# Altium PCB MotorDriverV3.PcbDoc
Units mil, origin at the board's own origin, x right, y up, seen from the top; angles counter-clockwise.
Board outline 6273.62 x 3988.19 mil, 4 copper layers (Top Layer, Mid-Layer 1, Mid-Layer 2, Bottom Layer); 219 components, 144 nets, 741 pads, 162 vias.
Unrouted connection lines stored in the file: 551.
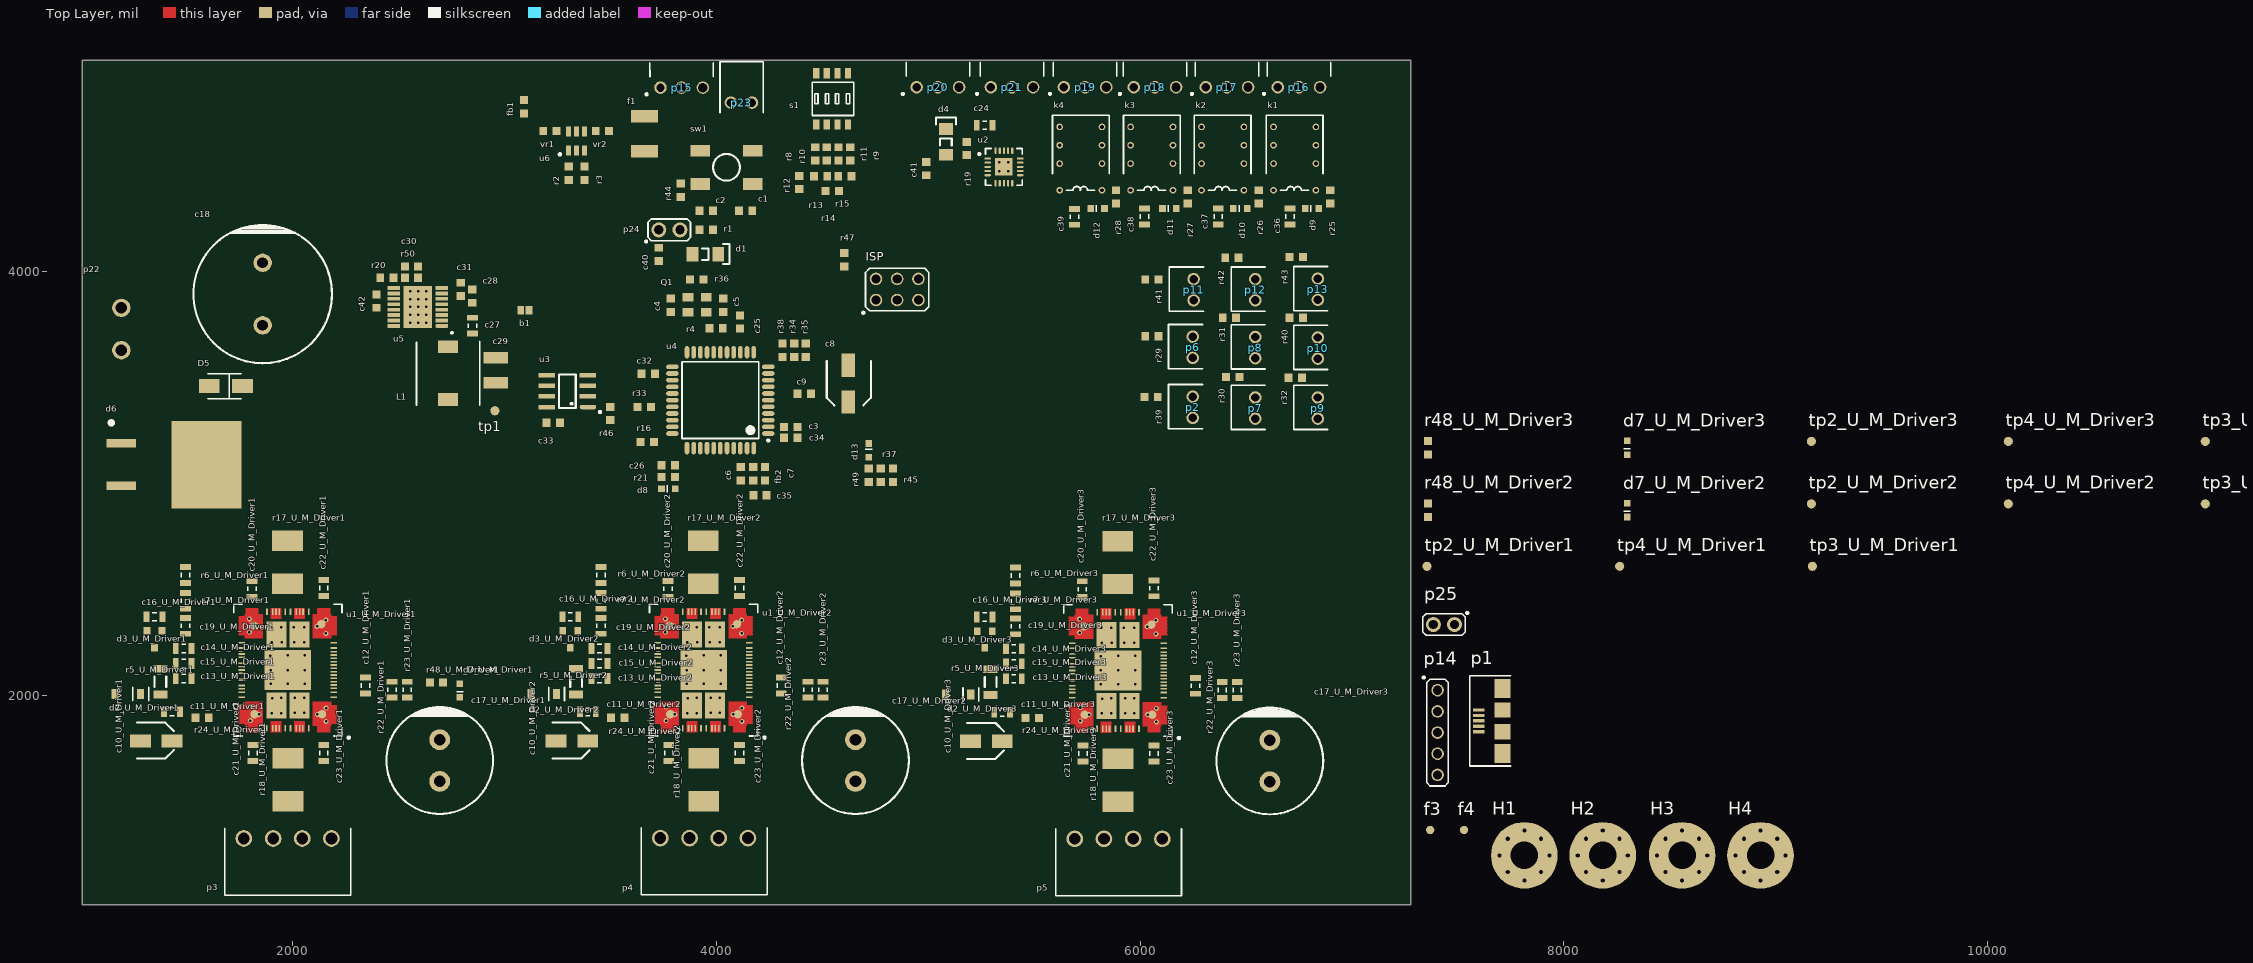
[diagram p0: Top Layer view]
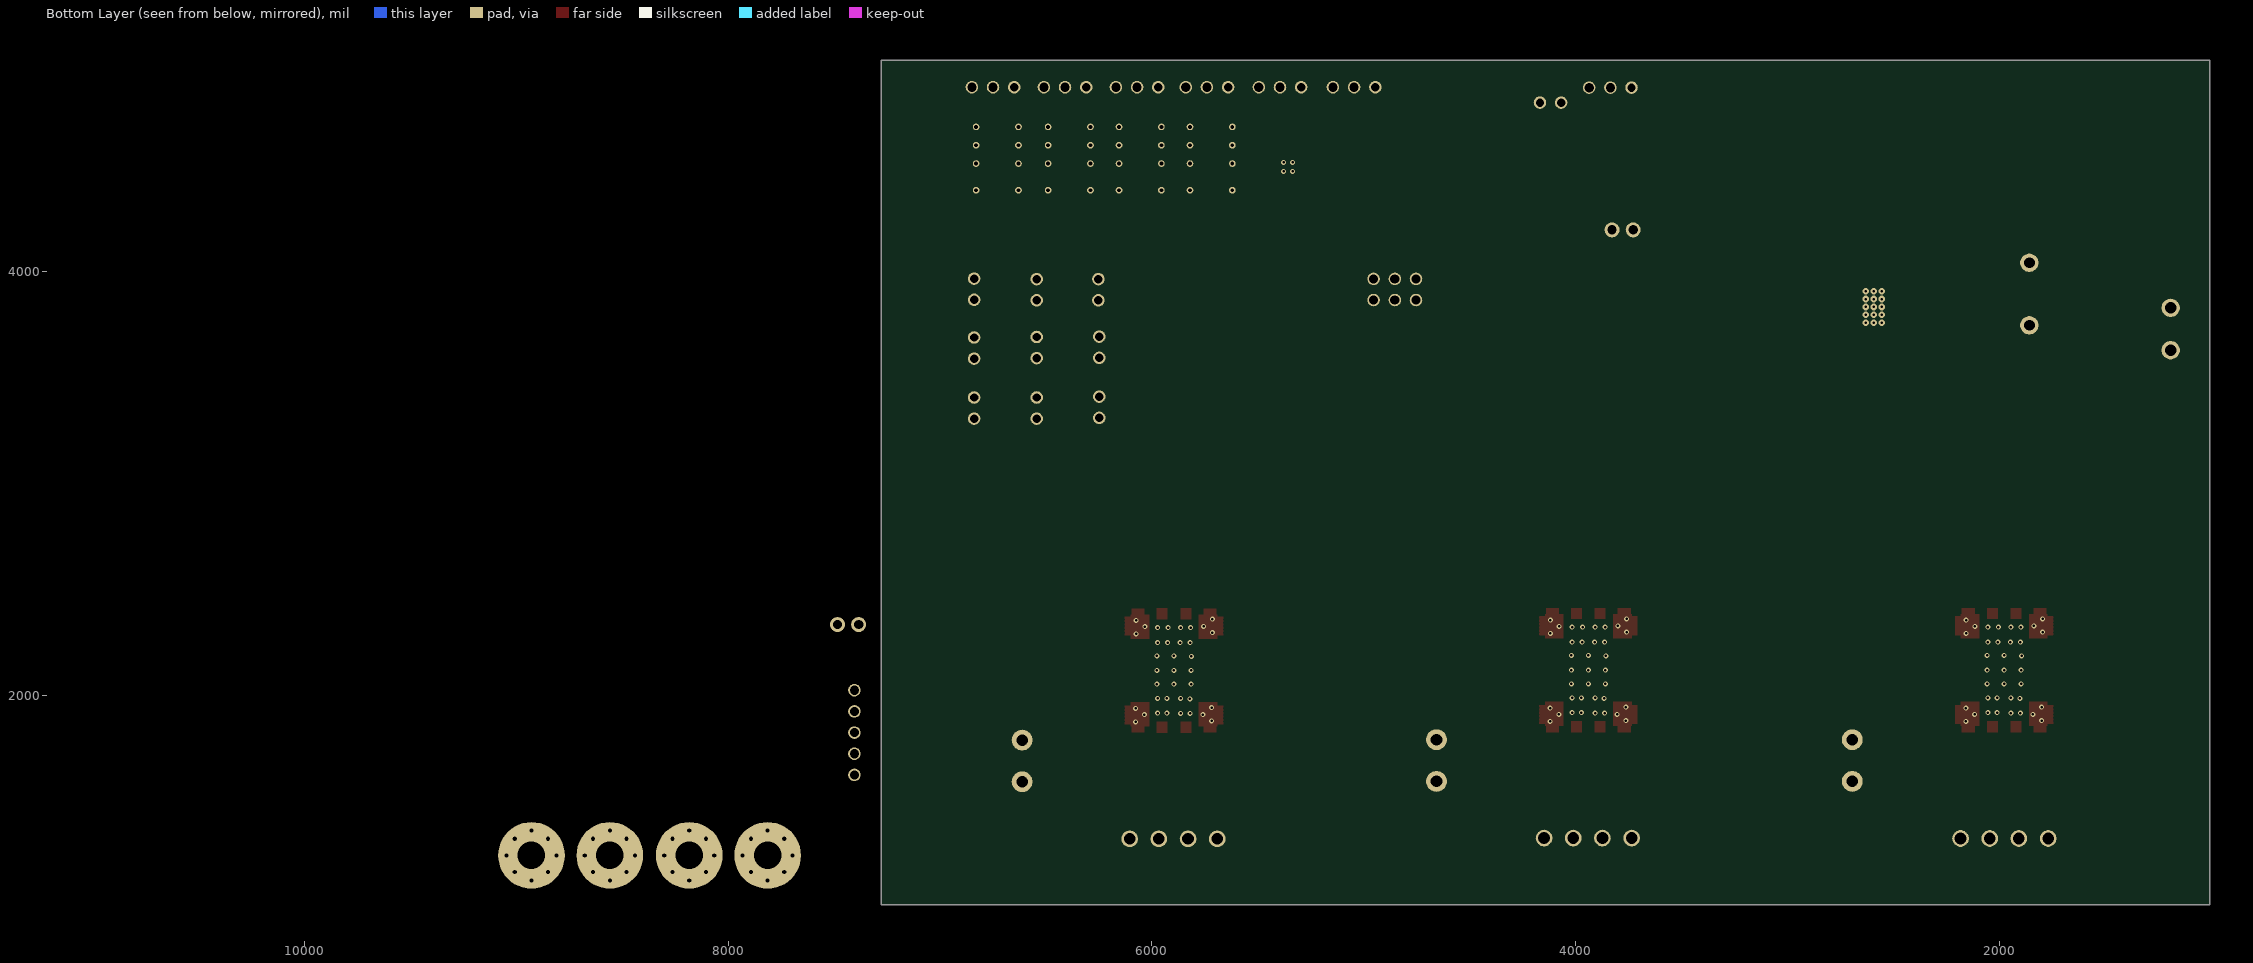
[diagram p1: Bottom Layer view, seen from below]

## Layer stack, top to bottom
Top Solder: solder mask 0.4, Solder Resist, Dk 3.5
Top Layer: signal copper 1.4
Dielectric 1: dielectric 12.6, FR-4, Dk 4.8
Mid-Layer 1: signal copper 1.4
Dielectric3: dielectric 12.6, FR-4, Dk 4.8
Mid-Layer 2: signal copper 1.4
Dielectric2: dielectric 12.6, FR-4, Dk 4.8
Bottom Layer: signal copper 1.4
Bottom Solder: solder mask 0.4, Solder Resist, Dk 3.5

## Board outline
1005,1011.81 7278.62,1011.81 7278.62,5000 1005,5000

## Design rules (kind name [scope] priority, off if disabled: settings)
Clearance [All] p1: gap=10 ignorepadtopadclearanceinfootprint=FALSE except(0: Arc-Hole Track-Hole SMDPad-Hole THPad-Hole Via-Hole Fill-Hole Poly-Hole Region-Hole Text-Hole)
DiffPairsRouting [All] p1: maxlimit=10 minlimit=10 mostfreqgap=10 toplayer_minwidth=15 toplayer_maxwidth=15 toplayer_prefwidth=15 midlayer1_minwidth=15 midlayer1_maxwidth=15 midlayer1_prefwidth=15 midlayer2_minwidth=15 midlayer2_maxwidth=15 midlayer2_prefwidth=15 bottomlayer_minwidth=15 bottomlayer_maxwidth=15 bottomlayer_prefwidth=15 maxuncoupledlength=500
PolygonConnect [All] p1: connectstyle=Relief reliefconductorwidth=10 reliefentries=4 polygonreliefangle="90 Angle" airgapwidth=10
RoomDefinition U_M_Driver3 [InComponentClass('U_M_Driver3')] p1: confinementstyle=ConfineIn formatcopy=TRUE lockcomponents=FALSE outline 7325,3100 11895,3100 11895,3350 7325,3350
RoomDefinition U_M_Driver2 [InComponentClass('U_M_Driver2')] p2: confinementstyle=ConfineIn formatcopy=TRUE lockcomponents=FALSE outline 7325,2805 11895,2805 11895,3055 7325,3055
RoomDefinition U_M_Driver1 [InComponentClass('U_M_Driver1')] p3: confinementstyle=ConfineIn formatcopy=TRUE lockcomponents=FALSE outline 7325,2580 10020,2580 10020,2760 7325,2760
RoutingVias [All] p1: holewidth=28 width=50 viastyle="Through Hole" minholewidth=28 minwidth=50 maxholewidth=28 maxwidth=50
SolderMaskExpansion [All] p1: expansion=4
Width [All] p1: maxlimit=10 minlimit=10 preferedwidth=10
29 further rules are at their usual default settings.

## Classes and differential pairs
channel class M_Driver: U_M_Driver1 U_M_Driver2 U_M_Driver3
net class SDO[1..3]: SDO1 SDO2 SDO3
net class Relay_OUT[1..4]: Relay_OUT1 Relay_OUT2 Relay_OUT3 Relay_OUT4 Relay_OUT5 Relay_OUT6 Relay_OUT7 Relay_OUT8
net class OUTB2_[1..3]: OUTB2_1 OUTB2_2 OUTB2_3
net class OUTB1_[1..3]: OUTB1_1 OUTB1_2 OUTB1_3
net class OUTA2_[1..3]: OUTA2_1 OUTA2_2 OUTA2_3
net class OUTA1_[1..3]: OUTA1_1 OUTA1_2 OUTA1_3
component class "U_Relais sheet": c24 c41 d4 d9 d10 d11 d12 p20 p21 r19 r25 r26 r27 r28 u2
component class "U_Power Supply": b1 c18 c27 c28 c29 c30 c31 c42 D5 d6 L1 p22 p25 r20 r50 tp1 u5
component class U_M_Driver3: c10_U_M_Driver3 c11_U_M_Driver3 c12_U_M_Driver3 c13_U_M_Driver3 c14_U_M_Driver3 c15_U_M_Driver3 c16_U_M_Driver3 c17_U_M_Driver3 c19_U_M_Driver3 c20_U_M_Driver3 c21_U_M_Driver3 c22_U_M_Driver3 c23_U_M_Driver3 d2_U_M_Driver3 d3_U_M_Driver3 d7_U_M_Driver3 r5_U_M_Driver3 r6_U_M_Driver3 r7_U_M_Driver3 r17_U_M_Driver3 r18_U_M_Driver3 r22_U_M_Driver3 r23_U_M_Driver3 r24_U_M_Driver3 r48_U_M_Driver3 tp2_U_M_Driver3 tp3_U_M_Driver3 tp4_U_M_Driver3 u1_U_M_Driver3
component class U_M_Driver2: c10_U_M_Driver2 c11_U_M_Driver2 c12_U_M_Driver2 c13_U_M_Driver2 c14_U_M_Driver2 c15_U_M_Driver2 c16_U_M_Driver2 c17_U_M_Driver2 c19_U_M_Driver2 c20_U_M_Driver2 c21_U_M_Driver2 c22_U_M_Driver2 c23_U_M_Driver2 d2_U_M_Driver2 d3_U_M_Driver2 d7_U_M_Driver2 r5_U_M_Driver2 r6_U_M_Driver2 r7_U_M_Driver2 r17_U_M_Driver2 r18_U_M_Driver2 r22_U_M_Driver2 r23_U_M_Driver2 r24_U_M_Driver2 r48_U_M_Driver2 tp2_U_M_Driver2 tp3_U_M_Driver2 tp4_U_M_Driver2 u1_U_M_Driver2
component class U_M_Driver1: c10_U_M_Driver1 c11_U_M_Driver1 c12_U_M_Driver1 c13_U_M_Driver1 c14_U_M_Driver1 c15_U_M_Driver1 c16_U_M_Driver1 c17_U_M_Driver1 c19_U_M_Driver1 c20_U_M_Driver1 c21_U_M_Driver1 c22_U_M_Driver1 c23_U_M_Driver1 d2_U_M_Driver1 d3_U_M_Driver1 d7_U_M_Driver1 r5_U_M_Driver1 r6_U_M_Driver1 r7_U_M_Driver1 r17_U_M_Driver1 r18_U_M_Driver1 r22_U_M_Driver1 r23_U_M_Driver1 r24_U_M_Driver1 r48_U_M_Driver1 tp2_U_M_Driver1 tp3_U_M_Driver1 tp4_U_M_Driver1 u1_U_M_Driver1
component class U_Controller: c1 c2 c3 c4 c5 c6 c7 c8 c9 c25 c26 c32 c33 c34 c35 c40 d1 d8 f1 fb1 fb2 p1 p14 p23 p24 Q1 r1 r2 r3 r4 r8 r9 r10 r11 r12 r13 r14 r15 r16 r21 r33 r34 r35 r36 r37 r38 r44 r45 r46 r47 s1 sw1 u3 u4 u6 vr1 vr2
component class "TOP Sheet": c36 c37 c38 c39 d13 f3 f4 H1 H2 H3 H4 ISP k1 k2 k3 k4 p2 p3 p4 p5 p6 p7 p8 p9 p10 p11 p12 p13 p15 p16 p17 p18 p19 r29 r30 r31 r32 r39 r40 r41 r42 r43 r49
differential pair USB: +USB_P -USB_N

## Components (designator, comment, footprint, x,y, rotation, side; value= is the part's Value field where it differs from the comment)
b1 "Solder Bridge" "Solder Bridge" 3095.55,3818.9 r0 top locked
c1 "100nF" 0603 4137.44,4288.86 r0 top locked
c2 "100nF" 0603 3952.44,4288.86 r180 top locked
c3 "1µF" 0603 4351.46,3267.72 r0 top locked
c4 "22pF" 0603 3784.53,3842.52 r90 top locked
c5 "22pF" 0603 4032.56,3842.52 r90 top locked
c6 "100nF" 0603 4115.24,3047.24 r90 top locked
c7 "100nF" 0603 4229.41,3047.24 r270 top locked
c8 "10u" Elco-C 4623.11,3472.44 r270 top locked
c9 "100nF" 0603 4414.45,3425.2 r0 top locked
c10_U_M_Driver1 "22µ" Elco-B 1354.61,1785.43 r0 top locked (schematic designator c10)
c10_U_M_Driver2 "22µ" Elco-B 3317.83,1785.43 r0 top locked (schematic designator c10)
c10_U_M_Driver3 "22µ" Elco-B 5274.53,1783.46 r0 top locked (schematic designator c10)
c11_U_M_Driver1 "100nF" 0805 1429.41,1923.23 r0 top locked (schematic designator c11)
c11_U_M_Driver2 "100nF" 0805 3392.64,1923.23 r0 top locked (schematic designator c11)
c11_U_M_Driver3 "100nF" 0805 5349.33,1921.26 r0 top locked (schematic designator c11)
c12_U_M_Driver1 "100nF" 0805 2342.8,2047.24 r270 top locked (schematic designator c12)
c12_U_M_Driver2 "100nF" 0805 4306.02,2047.24 r270 top locked (schematic designator c12)
c12_U_M_Driver3 "100nF" 0805 6262.72,2045.28 r270 top locked (schematic designator c12)
c13_U_M_Driver1 "100nF" 0805 1484.53,2080.71 r0 top locked (schematic designator c13)
c13_U_M_Driver2 "100nF" 0805 3447.76,2080.71 r0 top locked (schematic designator c13)
c13_U_M_Driver3 "100nF" 0805 5404.45,2078.74 r0 top locked (schematic designator c13)
c14_U_M_Driver1 "47nF" 0805 1484.53,2222.44 r0 top locked (schematic designator c14)
c14_U_M_Driver2 "47nF" 0805 3447.76,2222.44 r0 top locked (schematic designator c14)
c14_U_M_Driver3 "47nF" 0805 5404.45,2220.47 r0 top locked (schematic designator c14)
c15_U_M_Driver1 "470nF" 0805 1484.53,2151.57 r0 top locked (schematic designator c15)
c15_U_M_Driver2 "470nF" 0805 3447.76,2151.57 r0 top locked (schematic designator c15)
c15_U_M_Driver3 "470nF" 0805 5404.45,2149.61 r0 top locked (schematic designator c15)
c16_U_M_Driver1 "470n" 0805 1346.73,2372.05 r0 top locked (schematic designator c16)
c16_U_M_Driver2 "470n" 0805 3309.96,2372.05 r0 top locked (schematic designator c16)
c16_U_M_Driver3 "470n" 0805 5266.65,2370.08 r0 top locked (schematic designator c16)
c17_U_M_Driver1 "220µF 100V" "TH ELCO 12.5" 2693.19,1692.91 r270 top locked (schematic designator c17)
c17_U_M_Driver2 "220µF 100V" "TH ELCO 12.5" 4656.42,1692.91 r270 top locked (schematic designator c17)
c17_U_M_Driver3 "220µF 100V" "TH ELCO 12.5" 6613.11,1690.94 r270 top locked (schematic designator c17)
c18 "1000µF" "TH Elco 16" 1857.36,3895.67 r270 top locked
c19_U_M_Driver1 "100nF" 0805 1492.4,2328.74 r270 top locked (schematic designator c19)
c19_U_M_Driver2 "100nF" 0805 3455.63,2328.74 r270 top locked (schematic designator c19)
c19_U_M_Driver3 "100nF" 0805 5412.32,2326.77 r270 top locked (schematic designator c19)
c20_U_M_Driver1 "220n" 0805 1807.36,2503.94 r90 top locked (schematic designator c20)
c20_U_M_Driver2 "220n" 0805 3770.59,2503.94 r90 top locked (schematic designator c20)
c20_U_M_Driver3 "220n" 0805 5727.28,2501.97 r90 top locked (schematic designator c20)
c21_U_M_Driver1 "220n" 0805 1811.3,1728.35 r270 top locked (schematic designator c21)
c21_U_M_Driver2 "220n" 0805 3774.53,1728.35 r270 top locked (schematic designator c21)
c21_U_M_Driver3 "220n" 0805 5731.22,1726.38 r270 top locked (schematic designator c21)
c22_U_M_Driver1 "220n" 0805 2145.94,2507.87 r90 top locked (schematic designator c22)
c22_U_M_Driver2 "220n" 0805 4109.17,2507.87 r90 top locked (schematic designator c22)
c22_U_M_Driver3 "220n" 0805 6065.87,2505.91 r90 top locked (schematic designator c22)
c23_U_M_Driver1 "220n" 0805 2145.94,1728.35 r270 top locked (schematic designator c23)
c23_U_M_Driver2 "220n" 0805 4109.17,1728.35 r270 top locked (schematic designator c23)
c23_U_M_Driver3 "220n" 0805 6065.87,1726.38 r270 top locked (schematic designator c23)
c24 "100nF" 0805 5266.81,4692.91 r180 top locked
c25 "100nF" 0603 4111.3,3763.78 r90 top locked
c26 "100nF" 0603 3772.72,3086.61 r180 top locked
c27 "0.47µF" 0805 2847.52,3746.06 r270 top locked
c28 "10µF" 0603 2847.52,3885.83 r270 top locked
c29 "100µF" 1210 2957.76,3535.43 r270 top locked
c30 "33pF" 0603 2560.12,4025.59 r0 top locked
c31 "10µF" 0603 2792.4,3917.32 r270 top locked
c32 "100nF" 0603 3678.23,3519.68 r180 top locked
c33 "100nF" 0603 3229.41,3287.4 r180 top locked
c34 "100nF" 0603 4351.46,3216.54 r0 top locked
c35 "100nF" 0603 4205.79,2944.88 r0 top locked
c36 "1µF" 0805 6707.76,4261.81 r90 top locked
c37 "1µF" 0805 6369.17,4261.81 r90 top locked
c38 "1µF" 0805 6020.75,4261.81 r90 top locked
c39 "1µF" 0805 5690.04,4259.84 r90 top locked
c40 "1µF" 0603 3727.44,4082.68 r90 top locked
c41 "100nF" 0603 4991.22,4488.19 r90 top locked
c42 "100n" 0603 2394.76,3862.2 r270 top locked
d1 "CD1206-S01575" "1206 - DIODE" 3947.44,4083.86 r180 top locked
d2_U_M_Driver1 "DZ2W22000L" Mini2-F3-B 1220.75,2005.91 r270 top locked (schematic designator d2)
d2_U_M_Driver2 "DZ2W22000L" Mini2-F3-B 3183.98,2005.91 r270 top locked (schematic designator d2)
d2_U_M_Driver3 "DZ2W22000L" Mini2-F3-B 5140.67,2003.94 r270 top locked (schematic designator d2)
d3_U_M_Driver1 "BAS40-04" SOT23 1346.73,2265.75 r180 top locked (schematic designator d3)
d3_U_M_Driver2 "BAS40-04" SOT23 3309.96,2265.75 r180 top locked (schematic designator d3)
d3_U_M_Driver3 "BAS40-04" SOT23 5266.65,2263.78 r180 top locked (schematic designator d3)
d4 "CD1206-S01575" "1206 - DIODE" 5083.74,4614.17 r270 top locked
D5 "B260A-13-F" "DO-214AB (SMA)" 1684.13,3460.63 r180 top locked
d6 "NRVBB1060" "D²PAK 3" 1390.57,3090.55 r270 top locked
d7_U_M_Driver1 "Yellow SMD LED" "0603 - LED" 2788.46,2023.62 r90 top locked (schematic designator d7)
d7_U_M_Driver2 "Yellow SMD LED" "0603 - LED" 8300,2875 r90 top (schematic designator d7)
d7_U_M_Driver3 "Yellow SMD LED" "0603 - LED" 8300,3170 r90 top (schematic designator d7)
d8 "Green SMD LED" "0603 - LED" 3772.72,2976.38 r0 top locked
d9 "Yellow SMD LED" "0603 - LED" 6812.09,4299.21 r0 top locked
d10 "Yellow SMD LED" "0603 - LED" 6473.5,4299.21 r0 top locked
d11 "Yellow SMD LED" "0603 - LED" 6138.86,4299.21 r0 top locked
d12 "Yellow SMD LED" "0603 - LED" 5800.28,4299.21 r0 top locked
d13 "Yellow SMD LED" "0603 - LED" 4719.57,3157.48 r270 top locked
f1 "Fuse 500mA" "PTC Fuses" 3660.51,4651.57 r270 top locked
f3 "Fiducial" Fiducial 7370,1365 r0 top
f4 "Fiducial" Fiducial 7530,1365 r0 top
fb1 "0603 Ferrite Bead" 0603 3091.61,4779.53 r90 top locked
fb2 "0603 Ferrite Bead" 0603 4174.29,3047.24 r90 top locked
H1 "Mounting Hole" "Mounting Hole" 7815,1245 r0 top
H2 "Mounting Hole" "Mounting Hole" 8185,1245 r0 top
H3 "Mounting Hole" "Mounting Hole" 8560,1245 r0 top
H4 "Mounting Hole" "Mounting Hole" 8930,1245 r0 top
ISP "TC2030-MCP-NL" 2x3-HeaderPin 4853.43,3917.32 r180 top locked
k1 "IMxxTS" THT-8 6730.59,4535.31 r90 top locked
k2 "IMxxTS" THT-8 6390.59,4535.31 r90 top locked
k3 "IMxxTS" THT-8 6055.59,4535.31 r90 top locked
k4 "IMxxTS" THT-8 5720.59,4535.31 r90 top locked
L1 "18µH" "SMD Inductor 7.4x7.4" 2733.35,3521.65 r270 top locked
p1 "Micro USB Type B" "Micro USB Type B" 7655,1880 r90 top
p2 "Wire-to-Board 2P" WtB-F-2p_V 6249.09,3311.02 r90 top locked
p3 "4 contact" WtB-F-4p 1975.47,1324.8 r180 top locked
p4 "4 contact" WtB-F-4p 3942.01,1326.77 r180 top locked
p5 "4 contact" WtB-F-4p 5898.7,1322.83 r180 top locked
p6 "Wire-to-Board 2P" WtB-F-2p_V 6249.09,3594.49 r90 top locked
p7 "Wire-to-Board 2P" WtB-F-2p_V 6544.37,3307.09 r90 top locked
p8 "Wire-to-Board 2P" WtB-F-2p_V 6544.37,3592.91 r90 top locked
p9 "Wire-to-Board 2P" WtB-F-2p_V 6839.65,3307.09 r90 top locked
p10 "Wire-to-Board 2P" WtB-F-2p_V 6839.65,3590.55 r90 top locked
p11 "Wire-to-Board 2P" WtB-F-2p_V 6253.03,3866.14 r90 top locked
p12 "Wire-to-Board 2P" WtB-F-2p_V 6544.37,3866.14 r90 top locked
p13 "Wire-to-Board 2P" WtB-F-2p_V 6839.65,3868.5 r90 top locked
p14 "SPI" 1x5-HeaderPin 7405,1825 r90 top
p15 "Servo Port" "1X3 Headerpin Angled" 3835.71,4870.08 r180 top locked
p16 "Wire-to-Board 3P" "1X3 Headerpin Angled" 6750.59,4872.24 r180 top locked
p17 "Wire-to-Board 3P" "1X3 Headerpin Angled" 6410.59,4872.24 r180 top locked
p18 "Wire-to-Board 3P" "1X3 Headerpin Angled" 6070.59,4872.24 r180 top locked
p19 "Wire-to-Board 3P" "1X3 Headerpin Angled" 5740.59,4872.24 r180 top locked
p20 "Wire-to-Board 3P" "1X3 Headerpin Angled" 5045.59,4872.24 r180 top locked
p21 "Wire-to-Board 3P" "1X3 Headerpin Angled" 5395.59,4872.24 r180 top locked
p22 "MKDSN 1.5" SCREWWTB-2 1190.04,3730.31 r90 top locked
p23 "Wire-to-Board 2P" WtB-F-2p 4067.99,4799.21 r0 top locked
p24 "2 Pin Header" 1x2-HeaderPin 3777.83,4198.82 r180 top locked
p25 "Current Measurement" 1x2-HeaderPin 7435,2335 r0 top
Q1 "Crystal 16MHz, 3.2x2.5mm" X32 3908.46,3844.41 r180 top locked
r1 "10k" 0603 3952.44,4198.86 r0 top locked
r2 "22R" 0603 3302.24,4466.54 r270 top locked
r3 "22R" 0603 3377.05,4466.54 r270 top locked
r4 "1M" 0603 3998.46,3734.41 r0 top locked
r5_U_M_Driver1 "3k9" 1206 1374.29,2064.96 r270 top locked (schematic designator r5)
r5_U_M_Driver2 "3k9" 1206 3337.52,2064.96 r270 top locked (schematic designator r5)
r5_U_M_Driver3 "3k9" 1206 5294.21,2062.99 r270 top locked (schematic designator r5)
r6_U_M_Driver1 "27k" 0805 1492.4,2568.9 r90 top locked (schematic designator r6)
r6_U_M_Driver2 "27k" 0805 3455.63,2568.9 r90 top locked (schematic designator r6)
r6_U_M_Driver3 "27k" 0805 5412.32,2566.93 r90 top locked (schematic designator r6)
r7_U_M_Driver1 "1k8" 0805 1492.4,2446.85 r90 top locked (schematic designator r7)
r7_U_M_Driver2 "1k8" 0805 3455.63,2446.85 r90 top locked (schematic designator r7)
r7_U_M_Driver3 "1k8" 0805 5412.32,2444.88 r90 top locked (schematic designator r7)
r8 "1k" 0603 4466.57,4557.13 r90 top locked
r9 "1k" 0603 4631.57,4557.13 r90 top locked
r10 "1k" 0603 4521.57,4557.13 r90 top locked
r11 "1k" 0603 4576.57,4557.13 r90 top locked
r12 "1k" 0603 4391.57,4422.13 r270 top locked
r13 "520R" 0603 4491.57,4452.13 r180 top locked
r14 "520R" 0603 4546.57,4382.13 r180 top locked
r15 "520R" 0603 4606.57,4452.13 r180 top locked
r16 "10k" 0603 3672.71,3196.85 r0 top locked
r17_U_M_Driver1 "0R1" 2512 1974.68,2629.92 r270 top locked (schematic designator r17)
r17_U_M_Driver2 "0R1" 2512 3937.91,2629.92 r270 top locked (schematic designator r17)
r17_U_M_Driver3 "0R1" 2512 5894.61,2627.95 r270 top locked (schematic designator r17)
r18_U_M_Driver1 "0R1" 2512 1976.65,1602.36 r90 top locked (schematic designator r18)
r18_U_M_Driver2 "0R1" 2512 3939.88,1602.36 r90 top locked (schematic designator r18)
r18_U_M_Driver3 "0R1" 2512 5896.57,1600.39 r90 top locked (schematic designator r18)
r19 "10k" 0603 5182.17,4582.68 r90 top locked
r20 "442k" 0603 2443.98,3972.44 r0 top locked
r21 "330R" 0603 3772.72,3031.5 r0 top locked
r22_U_M_Driver1 "39k" 0805 2468.78,2027.56 r90 top locked (schematic designator r22)
r22_U_M_Driver2 "39k" 0805 4432.01,2027.56 r90 top locked (schematic designator r22)
r22_U_M_Driver3 "39k" 0805 6388.7,2025.59 r90 top locked (schematic designator r22)
r23_U_M_Driver1 "39k" 0805 2540.43,2027.56 r90 top locked (schematic designator r23)
r23_U_M_Driver2 "39k" 0805 4502.87,2027.56 r90 top locked (schematic designator r23)
r23_U_M_Driver3 "39k" 0805 6459.57,2025.59 r90 top locked (schematic designator r23)
r24_U_M_Driver1 "NP" 0603 1571.14,1895.67 r180 top locked (schematic designator r24)
r24_U_M_Driver2 "NP" 0603 3534.37,1895.67 r180 top locked (schematic designator r24)
r24_U_M_Driver3 "NP" 0603 5491.06,1893.7 r180 top locked (schematic designator r24)
r25 "220R" 0603 6898.7,4354.33 r90 top locked
r26 "220R" 0603 6560.12,4354.33 r90 top locked
r27 "220R" 0603 6225.47,4354.33 r90 top locked
r28 "220R" 0603 5886.89,4354.33 r90 top locked
r29 "10k" 0603 6056.18,3696.85 r180 top locked
r30 "10k" 0603 6438.07,3503.94 r180 top locked
r31 "10k" 0603 6422.32,3783.46 r180 top locked
r32 "10k" 0603 6733.35,3500 r180 top locked
r33 "47R" 0603 3658.54,3362.2 r0 top locked
r34 "47R" 0603 4367.2,3629.92 r270 top locked
r35 "47R" 0603 4422.32,3629.92 r270 top locked
r36 "47R" 0603 3906.57,3964.57 r180 top locked
r37 "47R" 0603 4776.65,3039.37 r90 top locked
r38 "47R" 0603 4312.09,3629.92 r270 top locked
r39 "10k" 0603 6052.24,3409.45 r180 top locked
r40 "10k" 0603 6737.28,3783.46 r180 top locked
r41 "10k" 0603 6056.18,3964.57 r180 top locked
r42 "10k" 0603 6434.13,4066.93 r180 top locked
r43 "10k" 0603 6737.28,4070.87 r180 top locked
r44 "47R" 0603 3831.77,4385.83 r270 top locked
r45 "10k" 0603 4833.74,3039.37 r90 top locked
r46 "10k" 0603 3499.09,3331.42 r270 top locked
r47 "10k" 0603 4603.43,4057.09 r270 top locked
r48_U_M_Driver1 "330R" 0603 2678.23,2061.02 r0 top locked (schematic designator r48)
r48_U_M_Driver2 "330R" 0603 7360,2875 r90 top (schematic designator r48)
r48_U_M_Driver3 "330R" 0603 7360,3170 r90 top (schematic designator r48)
r49 "330R" 0603 4719.57,3039.37 r270 top locked
r50 "1M" 0603 2560.12,3972.44 r180 top locked
s1 "MCDHN-04F-T-V" Dipswitch-4 4546.57,4817.13 r0 top locked
sw1 "MCDTSJW-6" MCDTSJW6 4047.44,4493.86 r180 top locked
tp1 "Test Point" "Test Point" 2953.82,3344.49 r0 top locked
tp2_U_M_Driver1 "Test Point" "Test Point" 7355,2610 r90 top (schematic designator tp2)
tp2_U_M_Driver2 "Test Point" "Test Point" 9170,2905 r90 top (schematic designator tp2)
tp2_U_M_Driver3 "Test Point" "Test Point" 9170,3200 r90 top (schematic designator tp2)
tp3_U_M_Driver1 "Test Point" "Test Point" 9175,2610 r90 top (schematic designator tp3)
tp3_U_M_Driver2 "Test Point" "Test Point" 11030,2905 r90 top (schematic designator tp3)
tp3_U_M_Driver3 "Test Point" "Test Point" 11030,3200 r90 top (schematic designator tp3)
tp4_U_M_Driver1 "Test Point" "Test Point" 8265,2610 r90 top (schematic designator tp4)
tp4_U_M_Driver2 "Test Point" "Test Point" 10100,2905 r90 top (schematic designator tp4)
tp4_U_M_Driver3 "Test Point" "Test Point" 10100,3200 r90 top (schematic designator tp4)
u1_U_M_Driver1 "powerSTEP01" VFQFPN 1976.26,2120.08 r180 top locked (schematic designator u1)
u1_U_M_Driver2 "powerSTEP01" VFQFPN 3939.49,2120.08 r180 top locked (schematic designator u1)
u1_U_M_Driver3 "powerSTEP01" VFQFPN 5896.18,2118.11 r180 top locked (schematic designator u1)
u2 "MAX4820ETP" TQFN-20 5357.36,4496.06 r90 top locked
u3 "256-Kbit F-RAM" SOIC8N 3296.34,3437.01 r90 top locked
u4 "ATMega32U4" TQFP-44 4018.46,3394.41 r180 top locked
u5 "LM46001" PWP0016G 2589.65,3834.65 r180 top locked
u6 "USBLC6-2SC6" SOT23-6 3339.65,4618.11 r0 top locked
vr1 "CG0603MLC-05E" 0603 3213.66,4665.35 r0 top locked
vr2 "CG0603MLC-05E" 0603 3461.69,4665.35 r180 top locked

## Footprints (in the part's own frame and the unit in brackets; to place one, negate y for a bottom-side part, rotate by r counter-clockwise, add the part's x,y. Pads: shape width x height; smd on the part's side, far side on the other; paste and mask are expansions set on the pad)
1x2-HeaderPin [mm] "1x2 Header Pin"
  round 1.8 hole 1.1: 1(1.27,0) 2(-1.27,0)
  silkscreen extent -2.53,-1.3 2.92,1.52, body extent -2.57,-1.3 2.51,1.24, height 5.94
"1X3 Headerpin Angled" [mm]
  round 1.5 hole 1: 1(2.54,0)
  round 1.5 hole 1.1: 2(0,0) 3(-2.54,0)
  silkscreen extent -3.81,-3 4.33,0.93, body extent -3.81,-10.69 3.81,0.36, height 5.97
1x5-HeaderPin [mm] "1x5 Header Pin"
  round 1.5 hole 1.1: 1(5.08,0) 2(2.54,0) 3(0,0) 4(-2.54,0) 5(-5.08,0)
  silkscreen extent -6.4,-1.3 6.73,1.78, body extent -6.35,-1.24 6.35,1.3, height 5.94
2x3-HeaderPin [mm] "2x3 Header Pin"
  round 1.5 hole 1.1: 1(2.54,1.27) 2(2.54,-1.27) 3(0,1.27) 4(0,-1.27) 5(-2.54,1.27) 6(-2.54,-1.27)
  silkscreen extent -3.8,-2.54 4.19,2.92, body extent -3.74,-2.5 3.88,2.58, height 5.94
0603 [mm] "Generic package"
  rect 0.95x1 smd: 1(-0.8,0) 2(0.8,0)
  body extent -0.8,-0.43 0.8,0.43, height 0.83
"0603 - LED" [mm] "Generic Package with marking"
  rect 0.8x0.8 smd: 1(-0.825,0) 2(0.825,0)
  silkscreen extent -0.15,-0.4 -0.15,0.4, body extent -0.82,-0.4 0.78,0.4, height 0.6
0805 [mm] "Generic Package"
  rect 0.7x1.3 smd: 1(-0.95,0) 2(0.95,0)
  silkscreen extent -0.25,-0.5 0.25,0.5, body extent -1,-0.63 1,0.63, height 0.43
1206 [mil] "Generic Package"
  rect 35.98x67.01 smd: 1(-60.51,0) 2(60.51,0)
  silkscreen extent -24,-28 24,28, body extent -63,-33 63,33, height 21
"1206 - DIODE" [mm] "Generic Package"
  rect 1.4x1.7 smd: 1(-1.537,0) 2(1.537,0)
  silkscreen extent -2.9,-1.2 0.4,1.2, body extent -1.6,-0.83 1.6,0.83, height 0.53
1210 [mm]
  rect 1.4x2.95 smd: 1(-1.5,0) 2(1.5,0)
  body extent -1.6,-1.25 1.6,1.25, height 1
2512 [mm]
  rect 2.45x3.7 smd: 1(-2.575,0) 2(2.575,0)
  body extent -3.17,-1.63 3.18,1.63, height 0.58
Dipswitch-4 [mm] "pitch 1.27x6.15"
  rect 0.76x1.25 smd: 1(-1.905,-3.075) 2(-0.635,-3.075) 3(0.635,-3.075) 4(1.905,-3.075) 5(1.905,3.075) 6(0.635,3.075) 7(-0.635,3.075) 8(-1.905,3.075)
  silkscreen extent -2.4,-2 2.6,2, body extent -3.11,-3.49 3.2,3.49, height 1.5
"DO-214AB (SMA)" [mm]
  rect 2.5x1.7 smd: 1(-2,0) 2(2,0)
  silkscreen extent -1.8,-1.5 2.2,1.53, body extent -2.5,-1.35 2.5,1.35, height 2.28
"D²PAK 3" [mil]
  rect 40x137.95 smd: 1(-100,-201.04) 3(100,-201.04)
  rect 412.99x329.92 smd: 4(0,201.04)
  silkscreen extent -209,-260 -184,-236, body extent -200,-249 200,352, height 192
Elco-B [mm] "SMD Electrolytic Capacitor-Size B-Pitch 1mm-4.3mm x 5.4mm"
  rect 2.5x1.6 smd: 1(-1.9,0) 2(1.9,0)
  silkscreen extent -2.3,-2.1 2.1,2.2, body extent -2.55,-2.1 2.45,2.2, height 6.42
Elco-C [mm] "SMD Electrolytic Capacitor-Size B-Pitch 1mm-5.3mm x 5.4mm"
  rect 2.8x1.6 smd: 1(-2.2,0) 2(2.2,0)
  silkscreen extent -2.7,-2.6 2.6,2.7, body extent -2.95,-2.65 2.95,2.65, height 5.41
Fiducial [mm]
  round 1 smd paste+0 mask+0.5: 0(0,0)
MCDTSJW6 [mm] "SMD Push Switch"
  rect 2.3x1.4 smd: 1(-3.15,2) 2(3.15,2) 3(-3.15,-2) 4(3.15,-2)
  silkscreen extent -1.6,-1.6 1.6,1.6, body extent -4,-3.25 4,3.25, height 4.3
"Micro USB Type B" [mm]
  rect 0.4x1.4 smd: 1(-1.3,1.425) 2(-0.65,1.425) 3(0,1.425) 4(0.65,1.425) 5(1.3,1.425)
  rect 2.3x1.9 smd: 6(-3.9,-1.425) 6(3.9,-1.425)
  rect 1.8x1.9 smd: 6(-1.3,-1.425) 6(1.3,-1.425)
  silkscreen extent -5.4,-2.4 5.4,2.5, body extent -3.99,-3.88 3.99,1.55, height 2.72
Mini2-F3-B [mm]
  rect 1.2x0.85 smd: 1(0,1.525) 2(0,-1.525)
  silkscreen extent -0.8,0.6 0.8,2.5, body extent -0.8,-1.3 0.8,1.3, height 0.8
"Mounting Hole" [mm]
  round 8 hole 3.3: 0(0,0)
"PTC Fuses" [mm]
  rect 1.5x3.2 smd: 1(-2.1,0) 2(2.1,0)
  body extent -2.2,-1.5 2.2,1.5, height 0.85
PWP0016G [mm] "PowerPAD TSSOP 16"
  rrect50% 1.5x0.45 smd: 1(-2.9,2.275)
  rect 1.5x0.45 smd: 2(-2.9,1.625) 3(-2.9,0.975) 4(-2.9,0.325) 5(-2.9,-0.325) 6(-2.9,-0.975) 7(-2.9,-1.625) 8(-2.9,-2.275) 9(2.9,-2.275) 10(2.9,-1.625) 11(2.9,-0.975) 12(2.9,-0.325) 13(2.9,0.325) 14(2.9,0.975) 15(2.9,1.625) 16(2.9,2.275)
  rect 3.4x5 smd mask-0.65: 17(0,0)
  silkscreen extent -4.2,3 -4,3.2, body extent -3.25,-2.55 3.25,2.55, height 1.06
SCREWWTB-2 [mm]
  round 2.2 hole 1.4: 1(-2.54,0) 2(2.54,0)
  body extent -5.07,-4.8 5.67,4.7, height 15
"SMD Inductor 7.4x7.4" [mm]
  rect 1.5x2.4 smd: 1(-3.15,0) 2(3.15,0)
  silkscreen extent -3.8,-3.8 3.8,3.8, body extent -3.65,-3.65 3.65,3.65, height 3.5
SOIC8N [mm] "SOIC8 Package, 127 Pitch, 390x490 Dimensions"
  oval 0.53x1.98 smd: 1(-1.905,-2.465)
  rect 0.53x1.98 smd: 2(-0.635,-2.465) 3(0.635,-2.465) 4(1.905,-2.465) 5(1.905,2.465) 6(0.635,2.465) 7(-0.635,2.465) 8(-1.905,2.465)
  silkscreen extent -2.6,-4 2,1, body extent -2.4,-3 2.5,3, height 1.7
"Solder Bridge" [mm]
  rect 0.8x1 smd: 1(-0.5,0) 2(0.5,0)
SOT23 [mm]
  rect 0.8x0.9 smd: 1(-0.9,-1) 2(0,1) 3(0.9,-1)
  body extent -1.5,-1.25 1.5,1.25, height 1.07
SOT23-6 [mm]
  rect 0.6x1.2 smd: 1(-0.95,-1.15) 2(0,-1.15) 3(0.95,-1.15) 4(0.95,1.15) 5(0,1.15) 6(-0.95,1.15)
  silkscreen extent -2.14,-1.74 -1.86,-1.46, body extent -1.47,-1.08 1.43,1.32, height 1
"Test Point" [mm]
  round 1.1 smd paste+0 mask+0: 1(0,0)
"TH ELCO 12.5" [mm] "D=12.5mm"
  round 2.5 hole 1.4: 1(-2.5,0) 2(2.5,0)
  silkscreen extent -6.4,-6.4 6.4,6.4, body extent -6.25,-6.25 6.25,6.25, height 25
"TH Elco 16" [mm] "D=16mm"
  round 2.2 hole 1.3: 1(-3.75,0) 2(3.75,0)
  silkscreen extent -8.3,-8.3 8.3,8.3, body extent -8,-8 8,8, height 35.5
THT-8 [mm]
  round 0.8 hole 0.45: 1(-3.8,-2.54) 2(-0.6,-2.54) 3(1.6,-2.54) 4(3.8,-2.54) 5(3.8,2.54) 6(1.6,2.54) 7(-0.6,2.54) 8(-3.8,2.54)
  silkscreen extent -3.8,-3.4 5.2,3.4, body extent -5,-3 5,3, height 5.8
TQFN-20 [mm] "QFN, 20-Leads, Body 4,00x4,00mm, Pitch 0,50mm, Thermal Pad 2,10x2,10mm, IPC Medium Density"
  oval 0.25x0.8 smd: 1(1,1.95) 2(0.5,1.95) 3(0,1.95) 4(-0.5,1.95) 5(-1,1.95) 11(-1,-1.95) 12(-0.5,-1.95) 13(0,-1.95) 14(0.5,-1.95) 15(1,-1.95)
  oval 0.8x0.25 smd: 6(-1.95,1) 7(-1.95,0.5) 8(-1.95,0) 9(-1.95,-0.5) 10(-1.95,-1) 16(1.95,-1) 17(1.95,-0.5) 18(1.95,0) 19(1.95,0.5) 20(1.95,1)
  rect 2.1x2.1 smd: 21(0,0)
  silkscreen extent -2.2,-2.2 2.2,3.07, body extent -2.05,-2.05 2.05,2.05, height 0.8
TQFP-44 [mm] "TQFP-44 pin, 127Pitch, 600-8N"
  oval 1.5x0.55 smd: 1(-5.75,4) 2(-5.75,3.2) 3(-5.75,2.4) 4(-5.75,1.6) 5(-5.75,0.8) 6(-5.75,0) 7(-5.75,-0.8) 8(-5.75,-1.6) 9(-5.75,-2.4) 10(-5.75,-3.2) 11(-5.75,-4) 23(5.75,-4) 24(5.75,-3.2) 25(5.75,-2.4) 26(5.75,-1.6) 27(5.75,-0.8) 28(5.75,0) 29(5.75,0.8) 30(5.75,1.6) 31(5.75,2.4) 32(5.75,3.2) 33(5.75,4)
  oval 0.55x1.5 smd: 12(-4,-5.75) 13(-3.2,-5.75) 14(-2.4,-5.75) 15(-1.6,-5.75) 16(-0.8,-5.75) 17(0,-5.75) 18(0.8,-5.75) 19(1.6,-5.75) 20(2.4,-5.75) 21(3.2,-5.75) 22(4,-5.75) 34(4,5.75) 35(3.2,5.75) 36(2.4,5.75) 37(1.6,5.75) 38(0.8,5.75) 39(0,5.75) 40(-0.8,5.75) 41(-1.6,5.75) 42(-2.4,5.75) 43(-3.2,5.75) 44(-4,5.75)
  silkscreen extent -5.88,-4.6 4.6,4.95, body extent -6,-6 6,6, height 1.2
VFQFPN [mm]
  rect 0.78x0.2 smd: 7(-5.5,3.27) 8(-5.5,2.65) 9(-5.5,2.2) 10(-5.5,1.8) 11(-5.5,1.4) 12(-5.5,1) 13(-5.5,0.6) 14(-5.5,0.2) 15(-5.5,-0.2) 16(-5.5,-0.6) 17(-5.5,-1) 18(-5.5,-1.4) 19(-5.5,-1.8) 20(-5.5,-2.2) 21(-5.5,-2.65) 22(-5.5,-3.27) 53(5.5,-3.27) 54(5.5,-2.65) 55(5.5,-1.93) 56(5.5,-1.54) 57(5.5,-0.8) 58(5.5,-0.4) 59(5.5,0) 60(5.5,0.4) 61(5.48,1.13) 62(5.5,1.85) 63(5.5,2.25) 64(5.5,2.65) 65(5.5,3.27)
  rect 0.2x0.78 smd: 33(-2.51,-7) 34(-1.82,-7) 35(-1.42,-7) 36(-1.01,-7) 37(-0.32,-7) 38(0.32,-7) 39(1.02,-7) 40(1.42,-7) 41(1.82,-7) 42(2.51,-7) 76(2.52,7) 77(1.82,7) 78(1.42,7) 79(1.02,7) 80(0.31,7) 81(-0.31,7) 82(-1.01,7) 83(-1.41,7) 84(-1.8,7) 85(-2.51,7)
  round 1 smd mask+0: 91(-4.1,5.3) 92(-4,-5.5) 95(4.1,-5.3) 96(4,5.3)
  rect 2.4x3.1 smd: 93(-1.38,-4.27) 94(1.38,-4.27) 97(1.38,4.27) 98(-1.38,4.27)
  rect 5.6x4.8 smd: 99(0,0)
  Top Layer region: 5.85,4.2 5.18,4.2 5.18,3.81 2.99,3.81 2.99,6.7 3.54,6.7 3.54,7.43 5.07,7.43 5.07,6.7 5.19,6.7 5.19,6.43 5.85,6.43
  Top Layer region: -5.85,4.2 -5.18,4.2 -5.18,3.81 -2.99,3.81 -2.99,6.7 -3.54,6.7 -3.54,7.43 -5.07,7.43 -5.07,6.7 -5.19,6.7 -5.19,6.43 -5.85,6.43
  Top Layer region: 5.85,-4.2 5.18,-4.2 5.18,-3.81 2.99,-3.81 2.99,-6.7 3.54,-6.7 3.54,-7.43 5.07,-7.43 5.07,-6.7 5.19,-6.7 5.19,-6.43 5.85,-6.43
  Top Layer region: -5.845,-6.42 -5.885,-6.42 -5.885,-6.22 -5.845,-6.22 -5.845,-6.02 -5.885,-6.02 -5.885,-5.82 -5.845,-5.82 -5.845,-5.62 -5.885,-5.62 -5.885,-5.42 -5.845,-5.42 -5.845,-5.22 -5.885,-5.22 -5.885,-5.02 -5.845,-5.02 -5.845,-4.82 -5.885,-4.82 -5.885,-4.62 -5.845,-4.62 -5.845,-4.42 -5.885,-4.42 -5.885,-4.22 -5.865,-4.22 -5.845,-4.2
  Top Layer region: 5.85,-4.22 5.89,-4.22 5.89,-4.42 5.85,-4.42 5.85,-4.62 5.89,-4.62 5.89,-4.82 5.85,-4.82 5.85,-5.02 5.89,-5.02 5.89,-5.23 5.85,-5.23 5.85,-5.42 5.89,-5.42 5.89,-5.62 5.85,-5.62 5.85,-5.82 5.89,-5.82 5.89,-6.02 5.85,-6.02 5.85,-6.22 5.89,-6.22 5.89,-6.42 5.87,-6.42 5.85,-6.43
  Top Layer region: -5.845,4.22 -5.885,4.22 -5.885,4.42 -5.845,4.42 -5.845,4.62 -5.885,4.62 -5.885,4.82 -5.845,4.82 -5.845,5.02 -5.885,5.02 -5.885,5.22 -5.845,5.22 -5.845,5.42 -5.885,5.42 -5.885,5.62 -5.845,5.62 -5.845,5.82 -5.885,5.82 -5.885,6.02 -5.845,6.02 -5.845,6.22 -5.885,6.22 -5.885,6.42 -5.865,6.42 -5.845,6.43
  Top Layer region: 5.85,6.42 5.89,6.42 5.89,6.22 5.85,6.22 5.85,6.02 5.89,6.02 5.89,5.82 5.85,5.82 5.85,5.62 5.89,5.62 5.89,5.42 5.85,5.42 5.85,5.22 5.89,5.22 5.89,5.02 5.85,5.02 5.85,4.82 5.89,4.82 5.89,4.62 5.85,4.62 5.85,4.42 5.89,4.42 5.89,4.22 5.87,4.22 5.85,4.2
  Top Layer region: -0.79,6.14 -2.05,6.14 -2.05,7.44 -0.79,7.44
  Top Layer region: 2.05,6.14 0.79,6.14 0.79,7.44 2.05,7.44
  Top Layer region: 2.05,-7.44 0.79,-7.44 0.79,-6.14 2.05,-6.14
  Top Layer region: -0.79,-7.44 -2.05,-7.44 -2.05,-6.14 -0.79,-6.14
  Top Layer region: -5.85,-4.2 -5.18,-4.2 -5.18,-3.81 -2.99,-3.81 -2.99,-6.7 -3.54,-6.7 -3.54,-7.43 -5.07,-7.43 -5.07,-6.7 -5.19,-6.7 -5.19,-6.43 -5.85,-6.43
  silkscreen extent -7.44,-7.9 6.5,8.24, body extent -5.5,-7 5.5,6.99, height 0.9
WtB-F-2p [mm]
  round 1.5 hole 1: 1(0,0) 2(2.54,0)
  silkscreen extent -1.3,-1.2 3.9,4.9, body extent -1.16,-1.38 3.92,13.05, height 6.02
WtB-F-2p_V [mm]
  round 1.5 hole 1: 1(0,0) 2(2.54,0)
  silkscreen extent -1.3,-1.2 4,2.9, body extent -1.18,-3.2 3.9,2.6, height 11.45
WtB-F-4p [mm]
  round 2 hole 1.4: 1(-5.25,0) 2(-1.75,0) 3(1.75,0) 4(5.25,0)
  silkscreen extent -7.55,-1.2 7.55,6.8
X32 [mm] "Crystal Oscillator X32 Package, 3.2x2.5"
  rect 1.3x1 smd: 1(-1.1,-0.9) 2(1.1,-0.9) 3(1.1,0.9) 4(-1.1,0.9)
  body extent -1.6,-1.25 1.6,1.25, height 0.91

## Part data
c1 c2 c3 c4 c5 c6 c7 c9 c25 c26 c28 c30 c31 c32 c33 c34 c35 c40 c41 c42: library part "0603 Capacitor", "...F"
c8: library part "Elco C"
c10_U_M_Driver1 c10_U_M_Driver2 c10_U_M_Driver3: library part "Elco B"
c11_U_M_Driver1 c11_U_M_Driver2 c11_U_M_Driver3 c12_U_M_Driver1 c12_U_M_Driver2 c12_U_M_Driver3 c13_U_M_Driver1 c13_U_M_Driver2 c13_U_M_Driver3 c14_U_M_Driver1 c14_U_M_Driver2 c14_U_M_Driver3 c15_U_M_Driver1 c15_U_M_Driver2 c15_U_M_Driver3 c16_U_M_Driver1 c16_U_M_Driver2 c16_U_M_Driver3 c19_U_M_Driver1 c19_U_M_Driver2 c19_U_M_Driver3 c20_U_M_Driver1 c20_U_M_Driver2 c20_U_M_Driver3 c21_U_M_Driver1 c21_U_M_Driver2 c21_U_M_Driver3 c22_U_M_Driver1 c22_U_M_Driver2 c22_U_M_Driver3 c23_U_M_Driver1 c23_U_M_Driver2 c23_U_M_Driver3 c24 c27 c36 c37 c38 c39: library part "0805 Capacitor", "...F"
c17_U_M_Driver1 c17_U_M_Driver2 c17_U_M_Driver3: library part "Elco TH d12.5", "d = 12.5mm"
c18: library part "Elco TH d16", "d = 16mm"
c29: library part "1210 Capacitor", "C1210C107M8PACTU"
d1 d4: "Switching Chip Diode"
d2_U_M_Driver1 d2_U_M_Driver2 d2_U_M_Driver3: "Zener diode"
D5: "Schottky Rectifier"
d6: "Schottky Diode 10A"
d7_U_M_Driver1 d7_U_M_Driver2 d7_U_M_Driver3 d8 d9 d10 d11 d12 d13: "0603 Package"
f1: library part "MF-MSMF Fuse", "Style 1"
ISP: library part "2x3 Header", "Header Pin"
k1 k2 k3 k4: "Standard THT Package"
L1: library part SRR0735A-180M, "Shielded Power Inducor"
p1: "SMD"
p3 p4 p5: library part "Wire-to-Board connector 4 contacts", "Wire-to-Board connector"
p14: library part "5 Pin Header"
p15: library part "Wire-to-Board 3 Pin"
p22: "Wire-to-board connection"
p25: library part "2 Pin Header", "2 Pin Header"
Q1: "X32"
r1 r2 r3 r4 r8 r9 r10 r11 r12 r13 r14 r15 r16 r19 r20 r21 r24_U_M_Driver1 r24_U_M_Driver2 r24_U_M_Driver3 r25 r26 r27 r28 r29 r30 r31 r32 r33 r34 r35 r36 r37 r38 r39 r40 r41 r42 r43 r44 r45 r46 r47 r48_U_M_Driver1 r48_U_M_Driver2 r48_U_M_Driver3 r49 r50: library part "0603 Resistor", "...R"
r5_U_M_Driver1 r5_U_M_Driver2 r5_U_M_Driver3: library part "1206 Resistor", "..R"
r6_U_M_Driver1 r6_U_M_Driver2 r6_U_M_Driver3 r7_U_M_Driver1 r7_U_M_Driver2 r7_U_M_Driver3 r22_U_M_Driver1 r22_U_M_Driver2 r22_U_M_Driver3 r23_U_M_Driver1 r23_U_M_Driver2 r23_U_M_Driver3: library part "0805 Resistor", "...R"
r17_U_M_Driver1 r17_U_M_Driver2 r17_U_M_Driver3 r18_U_M_Driver1 r18_U_M_Driver2 r18_U_M_Driver3: library part "2512 Resistor", "..R"
s1: "Dipswitch 4 way"
sw1: "Push button"
u1_U_M_Driver1 u1_U_M_Driver2 u1_U_M_Driver3: "VFQFPN"
u2: "20 TQFN-EP"
u3: library part FM25W256, "256-Kbit (32Kx8) Serial SPI F-RAM"
u6: "SOT23-6 ESD"
vr1 vr2: "5V, 8V Varistor - 0603"

## Via types
v1: diameter 23.62, hole 11.81, Top Layer to Bottom Layer, 115 vias
v2: diameter 31.5, hole 19.68, Top Layer to Bottom Layer, 32 vias
v3: diameter 31.5, hole 11.81, Top Layer to Bottom Layer, 15 vias

## Nets (pads, with @x,y where several pads share a name; then routed paths per layer and width w, separated by ;. In a path a pad name is that pad's centre, name@x,y a point inside that pad or via, vN(x,y) a via of type N, cw(c..) or ccw(c..) an arc to the next point about the centre after c; other vN are vias at no path point)
3v3: c1.1 c2.1 c3.1 c24.1 c25.1 c26.1 c33.2 c34.1 c35.1 c36.2 c37.2 c38.2 c39.2 d1.1 d4.1 d9.1 d10.1 d11.1 d12.1 d13.1 fb2.1 ISP.2 k1.8 k2.8 k3.8 k4.8 p15.3 p25.2 r1.2 r19.2 r21.2 r29.2 r30.2 r31.2 r32.2 r39.2 r40.2 r41.2 r42.2 r43.2 r45.2 r46.2 r47.2 s1.5 s1.6 s1.7 s1.8 u2.13 u2.19 u3.3 u3.8 u4.2 u4.14 u4.34
CS0: p14.1 r37.1 r45.1 u1_U_M_Driver1.10 u1_U_M_Driver2.10 u1_U_M_Driver3.10
CS1: r36.1 r47.1 u2.2
CS_FRAM: r33.1 r46.1 u3.1
ERC0: p2.2 r39.1 u4.18
ERC1: p6.2 r29.1 u4.19
ERC2: p7.2 r30.1 u4.25
ERC3: p8.2 r31.1 u4.22
ERC4: p9.2 r32.1 u4.26
ERC5: p10.2 r40.1 u4.27
F\L\A\G\: r23_U_M_Driver1.2 r23_U_M_Driver2.2 r23_U_M_Driver3.2 r49.2 u1_U_M_Driver1.16 u1_U_M_Driver2.16 u1_U_M_Driver3.16 u4.31
FRAM_H\O\L\D\: u3.7 u4.30
GND: c1.2 c2.2 c3.2 c4.2 c5.2 c6.1 c7.2 c8.1 c9.2 c10_U_M_Driver1.1 c10_U_M_Driver2.1 c10_U_M_Driver3.1 c11_U_M_Driver1.1 c11_U_M_Driver2.1 c11_U_M_Driver3.1 c12_U_M_Driver1.2 c12_U_M_Driver2.2 c12_U_M_Driver3.2 c13_U_M_Driver1.1 c13_U_M_Driver2.1 c13_U_M_Driver3.1 c15_U_M_Driver1.1 c15_U_M_Driver2.1 c15_U_M_Driver3.1 c17_U_M_Driver1.1 c17_U_M_Driver2.1 c17_U_M_Driver3.1 c18.1 c19_U_M_Driver1.1 c19_U_M_Driver2.1 c19_U_M_Driver3.1 c20_U_M_Driver1.2 c20_U_M_Driver2.2 c20_U_M_Driver3.2 c21_U_M_Driver1.2 c21_U_M_Driver2.2 c21_U_M_Driver3.2 c22_U_M_Driver1.2 c22_U_M_Driver2.2 c22_U_M_Driver3.2 c23_U_M_Driver1.2 c23_U_M_Driver2.2 c23_U_M_Driver3.2 c24.2 c25.2 c26.2 c28.1 c29.1 c31.1 c32.2 c33.1 c34.2 c35.2 c36.1 c37.1 c38.1 c39.1 c40.1 c41.1 c42.1 d2_U_M_Driver1.2 d2_U_M_Driver2.2 d2_U_M_Driver3.2 d8.2 fb1.1 fb1.2 ISP.6 p1.5 p1.6 p2.1 p6.1 p7.1 p8.1 p9.1 p10.1 p11.1 p12.1 p13.1 p14.5 p15.1 p22.2 Q1.2 Q1.4 r7_U_M_Driver1.1 r7_U_M_Driver2.1 r7_U_M_Driver3.1 r12.2 r16.1 r17_U_M_Driver1.1 r17_U_M_Driver2.1 r17_U_M_Driver3.1 r18_U_M_Driver1.1 r18_U_M_Driver2.1 r18_U_M_Driver3.1 r20.1 sw1.3 sw1.4 u1_U_M_Driver1.8 u1_U_M_Driver1.21 u1_U_M_Driver1.59 u1_U_M_Driver1.99 u1_U_M_Driver2.8 u1_U_M_Driver2.21 u1_U_M_Driver2.59 u1_U_M_Driver2.99 u1_U_M_Driver3.8 u1_U_M_Driver3.21 u1_U_M_Driver3.59 u1_U_M_Driver3.99 u2.7 u2.10 u2.16 u2.21 u3.4 u4.5 u4.15 u4.23 u4.35 u4.43 u5.6 u5.10 u5.15 u5.16 u5.17 u6.2 vr1.1 vr2.1
  other v1: 5815.47,2053.15 5896.18,2053.15 5976.89,2053.15 1895.55,2055.12 1976.26,2055.12 2056.97,2055.12 3858.78,2055.12 3939.49,2055.12 4020.2,2055.12 5815.47,2118.11 5896.18,2118.11 5976.89,2118.11 1895.55,2120.08 1976.26,2120.08 2056.97,2120.08 3858.78,2120.08 3939.49,2120.08 4020.2,2120.08 5813.5,2185.04 1893.58,2187.01 3856.81,2187.01 5896.18,2187.01 5976.89,2187.01 1976.26,2188.98 2056.97,2188.98 3939.49,2188.98 4020.2,2188.98 5335.71,4474.41 5379.02,4474.41 5335.71,4517.72 5379.02,4517.72
  other v3: 2554.21,3759.84 2591.61,3759.84 2629.02,3759.84 2554.21,3797.24 2591.61,3797.24 2629.02,3797.24 2554.21,3834.65 2591.61,3834.65 2629.02,3834.65 2554.21,3872.05 2591.61,3872.05 2629.02,3872.05 2554.21,3909.45 2591.61,3909.45 2629.02,3909.45
Home0: p11.2 r41.1 u4.38
Home1: p12.2 r42.1 u4.37
Home2: p13.2 r43.1 u4.36
M_Reset: u1_U_M_Driver1.19 u1_U_M_Driver2.19 u1_U_M_Driver3.19 u4.1
MOSI: ISP.1 p14.3 r34.1 u1_U_M_Driver1.12 u2.3 u3.5
Netb1_2: b1.2 p25.1
Netc4_1: c4.1 Q1.3 r4.1 u4.17
Netc5_1: c5.1 Q1.1 r4.2 u4.16
Netc6_2: c6.2 u4.42
Netc7_1: c7.1 c32.1 fb2.2 u4.24 u4.44
Netc13_U_M_Driver1_2: c13_U_M_Driver1.2 c15_U_M_Driver1.2 tp4_U_M_Driver1.1 u1_U_M_Driver1.58 u1_U_M_Driver1.60
Netc13_U_M_Driver2_2: c13_U_M_Driver2.2 c15_U_M_Driver2.2 tp4_U_M_Driver2.1 u1_U_M_Driver2.58 u1_U_M_Driver2.60
Netc13_U_M_Driver3_2: c13_U_M_Driver3.2 c15_U_M_Driver3.2 tp4_U_M_Driver3.1 u1_U_M_Driver3.58 u1_U_M_Driver3.60
Netc14_U_M_Driver1_1: c14_U_M_Driver1.1 d3_U_M_Driver1.2
Netc14_U_M_Driver1_2: c14_U_M_Driver1.2 u1_U_M_Driver1.57
Netc14_U_M_Driver2_1: c14_U_M_Driver2.1 d3_U_M_Driver2.2
Netc14_U_M_Driver2_2: c14_U_M_Driver2.2 u1_U_M_Driver2.57
Netc14_U_M_Driver3_1: c14_U_M_Driver3.1 d3_U_M_Driver3.2
Netc14_U_M_Driver3_2: c14_U_M_Driver3.2 u1_U_M_Driver3.57
Netc16_U_M_Driver1_1: c16_U_M_Driver1.1 d3_U_M_Driver1.3 tp2_U_M_Driver1.1 u1_U_M_Driver1.56
Netc16_U_M_Driver2_1: c16_U_M_Driver2.1 d3_U_M_Driver2.3 tp2_U_M_Driver2.1 u1_U_M_Driver2.56
Netc16_U_M_Driver3_1: c16_U_M_Driver3.1 d3_U_M_Driver3.3 tp2_U_M_Driver3.1 u1_U_M_Driver3.56
Netc27_1: c27.1 u5.3
Netc28_2: c28.2 u5.4
Netc30_1: c30.1 r20.2 r50.2 u5.9
Netc40_2: c40.2 p24.1
Netc41_2: c41.2 d4.2 r19.1 u2.1 u2.20
Netd2_U_M_Driver1_1: d2_U_M_Driver1.1 r5_U_M_Driver1.2 u1_U_M_Driver1.61
Netd2_U_M_Driver2_1: d2_U_M_Driver2.1 r5_U_M_Driver2.2 u1_U_M_Driver2.61
Netd2_U_M_Driver3_1: d2_U_M_Driver3.1 r5_U_M_Driver3.2 u1_U_M_Driver3.61
Netd7_U_M_Driver1_2: d7_U_M_Driver1.2 r48_U_M_Driver1.2
Netd7_U_M_Driver2_2: d7_U_M_Driver2.2 r48_U_M_Driver2.2
Netd7_U_M_Driver3_2: d7_U_M_Driver3.2 r48_U_M_Driver3.2
Netd8_1: d8.1 r21.1
Netd9_2: d9.2 r25.1
Netd10_2: d10.2 r26.1
Netd11_2: d11.2 r27.1
Netd12_2: d12.2 r28.1
Netd13_2: d13.2 r49.1
Netf1_1: f1.1 p1.1 u6.5
Netk1_2: k1.2 k1.7 p16.3
Netk1_3: k1.3 k1.6 p16.2
Netk1_4: k1.4 k1.5 p16.1
Netk2_2: k2.2 k2.7 p17.3
Netk2_3: k2.3 k2.6 p17.2
Netk2_4: k2.4 k2.5 p17.1
Netk3_2: k3.2 k3.7 p18.3
Netk3_3: k3.3 k3.6 p18.2
Netk3_4: k3.4 k3.5 p18.1
Netk4_2: k4.2 k4.7 p19.3
Netk4_3: k4.3 k4.6 p19.2
Netk4_4: k4.4 k4.5 p19.1
Netp1_2: p1.2 u6.4 vr2.2
Netp1_3: p1.3 u6.6 vr1.2
Netr2_1: r2.1 u6.1
Netr3_1: r3.1 u6.3
Netr6_U_M_Driver1_1: r6_U_M_Driver1.1 r7_U_M_Driver1.2 u1_U_M_Driver1.54
Netr6_U_M_Driver2_1: r6_U_M_Driver2.1 r7_U_M_Driver2.2 u1_U_M_Driver2.54
Netr6_U_M_Driver3_1: r6_U_M_Driver3.1 r7_U_M_Driver3.2 u1_U_M_Driver3.54
Netr8_1: r8.1 r12.1 r13.2
Netr8_2: r8.2 s1.1
Netr9_1: r9.1 r15.1 u4.41
Netr9_2: r9.2 s1.4
Netr10_1: r10.1 r13.1 r14.2
Netr10_2: r10.2 s1.2
Netr11_1: r11.1 r14.1 r15.2
Netr11_2: r11.2 s1.3
Netr16_2: r16.2 u4.33
Netr17_U_M_Driver1_2: r17_U_M_Driver1.2 u1_U_M_Driver1.20 u1_U_M_Driver1.34 u1_U_M_Driver1.35 u1_U_M_Driver1.36 u1_U_M_Driver1.39 u1_U_M_Driver1.40 u1_U_M_Driver1.41
Netr17_U_M_Driver2_2: r17_U_M_Driver2.2 u1_U_M_Driver2.20 u1_U_M_Driver2.34 u1_U_M_Driver2.35 u1_U_M_Driver2.36 u1_U_M_Driver2.39 u1_U_M_Driver2.40 u1_U_M_Driver2.41
Netr17_U_M_Driver3_2: r17_U_M_Driver3.2 u1_U_M_Driver3.20 u1_U_M_Driver3.34 u1_U_M_Driver3.35 u1_U_M_Driver3.36 u1_U_M_Driver3.39 u1_U_M_Driver3.40 u1_U_M_Driver3.41
Netr18_U_M_Driver1_2: r18_U_M_Driver1.2 u1_U_M_Driver1.9 u1_U_M_Driver1.77 u1_U_M_Driver1.78 u1_U_M_Driver1.79 u1_U_M_Driver1.82 u1_U_M_Driver1.83 u1_U_M_Driver1.84
Netr18_U_M_Driver2_2: r18_U_M_Driver2.2 u1_U_M_Driver2.9 u1_U_M_Driver2.77 u1_U_M_Driver2.78 u1_U_M_Driver2.79 u1_U_M_Driver2.82 u1_U_M_Driver2.83 u1_U_M_Driver2.84
Netr18_U_M_Driver3_2: r18_U_M_Driver3.2 u1_U_M_Driver3.9 u1_U_M_Driver3.77 u1_U_M_Driver3.78 u1_U_M_Driver3.79 u1_U_M_Driver3.82 u1_U_M_Driver3.83 u1_U_M_Driver3.84
Netr22_U_M_Driver1_2: r22_U_M_Driver1.2 r48_U_M_Driver1.1 u1_U_M_Driver1.15
Netr22_U_M_Driver2_2: r22_U_M_Driver2.2 r48_U_M_Driver2.1 u1_U_M_Driver2.15
Netr22_U_M_Driver3_2: r22_U_M_Driver3.2 r48_U_M_Driver3.1 u1_U_M_Driver3.15
Netr24_U_M_Driver1_1: r24_U_M_Driver1.1 u1_U_M_Driver1.64
Netr24_U_M_Driver1_2: r24_U_M_Driver1.2 u1_U_M_Driver1.63
Netr24_U_M_Driver2_1: r24_U_M_Driver2.1 u1_U_M_Driver2.64
Netr24_U_M_Driver2_2: r24_U_M_Driver2.2 u1_U_M_Driver2.63
Netr24_U_M_Driver3_1: r24_U_M_Driver3.1 u1_U_M_Driver3.64
Netr24_U_M_Driver3_2: r24_U_M_Driver3.2 u1_U_M_Driver3.63
Netr33_2: r33.2 u4.29
Netr34_2: r34.2 u4.10
Netr35_2: r35.2 u4.9
Netr36_2: r36.2 u4.28
Netr37_2: r37.2 u4.8
Netr38_2: r38.2 u4.11
Netr44_1: r44.1 sw1.2
OUTA1_1: p3.4 u1_U_M_Driver1.38 u1_U_M_Driver1.42 u1_U_M_Driver1.53 u1_U_M_Driver1.94
  other v1: 1899.49,2251.97 1946.73,2251.97 1897.52,2322.83 1944.76,2322.83
OUTA1_2: p4.4 u1_U_M_Driver2.38 u1_U_M_Driver2.42 u1_U_M_Driver2.53 u1_U_M_Driver2.94
  other v1: 3862.72,2251.97 3909.96,2251.97 3860.75,2322.83 3907.99,2322.83
OUTA1_3: p5.4 u1_U_M_Driver3.38 u1_U_M_Driver3.42 u1_U_M_Driver3.53 u1_U_M_Driver3.94
  other v1: 5819.41,2250 5866.65,2250 5817.44,2320.87 5864.68,2320.87
OUTA2_1: p3.1 u1_U_M_Driver1.22 u1_U_M_Driver1.33 u1_U_M_Driver1.37 u1_U_M_Driver1.93
  other v1: 2005.79,2251.97 2053.03,2251.97 2003.82,2322.83 2053.03,2322.83
OUTA2_2: p4.1 u1_U_M_Driver2.22 u1_U_M_Driver2.33 u1_U_M_Driver2.37 u1_U_M_Driver2.93
  other v1: 3969.02,2251.97 4016.26,2251.97 3967.05,2322.83 4016.26,2322.83
OUTA2_3: p5.1 u1_U_M_Driver3.22 u1_U_M_Driver3.33 u1_U_M_Driver3.37 u1_U_M_Driver3.93
  other v1: 5925.71,2250 5972.95,2250 5923.74,2320.87 5972.95,2320.87
OUTB1_1: p3.3 u1_U_M_Driver1.65 u1_U_M_Driver1.76 u1_U_M_Driver1.80 u1_U_M_Driver1.97
  other v1: 1899.49,1917.32 1944.76,1917.32 1901.46,1986.22 1944.76,1988.19
OUTB1_2: p4.3 u1_U_M_Driver2.65 u1_U_M_Driver2.76 u1_U_M_Driver2.80 u1_U_M_Driver2.97
  other v1: 3862.72,1917.32 3907.99,1917.32 3864.68,1986.22 3907.99,1988.19
OUTB1_3: p5.3 u1_U_M_Driver3.65 u1_U_M_Driver3.76 u1_U_M_Driver3.80 u1_U_M_Driver3.97
  other v1: 5819.41,1915.35 5864.68,1915.35 5821.38,1984.25 5864.68,1986.22
OUTB2_1: p3.2 u1_U_M_Driver1.7 u1_U_M_Driver1.81 u1_U_M_Driver1.85 u1_U_M_Driver1.98
  other v1: 2009.72,1919.29 2053.03,1919.29 2009.72,1988.19 2053.03,1988.19
OUTB2_2: p4.2 u1_U_M_Driver2.7 u1_U_M_Driver2.81 u1_U_M_Driver2.85 u1_U_M_Driver2.98
  other v1: 3972.95,1919.29 4016.26,1919.29 3972.95,1988.19 4016.26,1988.19
OUTB2_3: p5.2 u1_U_M_Driver3.7 u1_U_M_Driver3.81 u1_U_M_Driver3.85 u1_U_M_Driver3.98
  other v1: 5929.65,1917.32 5972.95,1917.32 5929.65,1986.22 5972.95,1986.22
PS: D5.2 d6.1 d6.3 p22.1
PSU_O: b1.1 c29.2 c30.2 c31.2 L1.2 r50.1 tp1.1 u5.5
PWM: p15.2 u4.12
R\E\S\E\T\: d1.2 ISP.5 p24.2 r1.1 r44.2 u4.13
Relay_COM: p20.3 p21.3
Relay_OUT1: k1.1 r25.2 u2.18
Relay_OUT2: k2.1 r26.2 u2.17
Relay_OUT3: k3.1 r27.2 u2.15
Relay_OUT4: k4.1 r28.2 u2.14
Relay_OUT5: p21.2 u2.12
Relay_OUT6: p21.1 u2.11
Relay_OUT7: p20.2 u2.9
Relay_OUT8: p20.1 u2.8
RX: p23.2 u4.20
SCK: ISP.3 p14.2 r35.1 u1_U_M_Driver1.11 u1_U_M_Driver2.11 u1_U_M_Driver3.11 u2.4 u3.6
SDO1: u1_U_M_Driver1.14 u1_U_M_Driver2.12
SDO2: u1_U_M_Driver2.14 u1_U_M_Driver3.12
SDO3: ISP.4 p14.4 r38.1 u1_U_M_Driver3.14 u2.5 u3.2
SW: u5.2
SW_O: c27.2 L1.1 u5.1
TX: p23.1 u4.21
USB_N: r3.2 u4.3
USB_P: r2.2 u4.4
VIN: c18.2 c42.2 D5.1 u5.12 u5.13 u5.14
VREG_U_M_Driver1: c10_U_M_Driver1.2 c11_U_M_Driver1.2 c12_U_M_Driver1.1 d7_U_M_Driver1.1 r22_U_M_Driver1.1 r23_U_M_Driver1.1 tp3_U_M_Driver1.1 u1_U_M_Driver1.13 u1_U_M_Driver1.62
VREG_U_M_Driver2: c10_U_M_Driver2.2 c11_U_M_Driver2.2 c12_U_M_Driver2.1 d7_U_M_Driver2.1 r22_U_M_Driver2.1 r23_U_M_Driver2.1 tp3_U_M_Driver2.1 u1_U_M_Driver2.13 u1_U_M_Driver2.62
VREG_U_M_Driver3: c10_U_M_Driver3.2 c11_U_M_Driver3.2 c12_U_M_Driver3.1 d7_U_M_Driver3.1 r22_U_M_Driver3.1 r23_U_M_Driver3.1 tp3_U_M_Driver3.1 u1_U_M_Driver3.13 u1_U_M_Driver3.62
VS: c16_U_M_Driver1.2 c16_U_M_Driver2.2 c16_U_M_Driver3.2 c17_U_M_Driver1.2 c17_U_M_Driver2.2 c17_U_M_Driver3.2 c19_U_M_Driver1.2 c19_U_M_Driver2.2 c19_U_M_Driver3.2 c20_U_M_Driver1.1 c20_U_M_Driver2.1 c20_U_M_Driver3.1 c21_U_M_Driver1.1 c21_U_M_Driver2.1 c21_U_M_Driver3.1 c22_U_M_Driver1.1 c22_U_M_Driver2.1 c22_U_M_Driver3.1 c23_U_M_Driver1.1 c23_U_M_Driver2.1 c23_U_M_Driver3.1 d3_U_M_Driver1.1 d3_U_M_Driver2.1 d3_U_M_Driver3.1 d6.4 r5_U_M_Driver1.1 r5_U_M_Driver2.1 r5_U_M_Driver3.1 r6_U_M_Driver1.2 r6_U_M_Driver2.2 r6_U_M_Driver3.2 u1_U_M_Driver1.55 u1_U_M_Driver1.91 u1_U_M_Driver1.92 u1_U_M_Driver1.95 u1_U_M_Driver1.96 u1_U_M_Driver2.55 u1_U_M_Driver2.91 u1_U_M_Driver2.92 u1_U_M_Driver2.95 u1_U_M_Driver2.96 u1_U_M_Driver3.55 u1_U_M_Driver3.91 u1_U_M_Driver3.92 u1_U_M_Driver3.95 u1_U_M_Driver3.96
  other v1: 6077.28,1875.98 2157.36,1877.95 4120.59,1877.95 5719.02,1879.92 1799.09,1881.89 3762.32,1881.89 5760.35,1909.45 6035.94,1909.45 1840.43,1911.42 2116.02,1911.42 3803.66,1911.42 4079.25,1911.42 6077.28,1938.98 2157.36,1940.94 4120.59,1940.94 5719.02,1942.91 1799.09,1944.88 3762.32,1944.88 6075.31,2291.34 2155.39,2293.31 4118.62,2293.31 5715.08,2297.24 1795.16,2299.21 3758.39,2299.21 6033.98,2324.8 2114.06,2326.77 4077.28,2326.77 5756.42,2326.77 1836.5,2328.74 3799.72,2328.74 6075.31,2354.33 2155.39,2356.3 4118.62,2356.3 5715.08,2360.24 1795.16,2362.2 3758.39,2362.2
VUSB: c8.2 c9.1 f1.2 u4.7
pads on no net: f3.0 f4.0 H1.0 H2.0 H3.0 H4.0 p1.4 sw1.1 u1_U_M_Driver1.17 u1_U_M_Driver1.18 u1_U_M_Driver2.17 u1_U_M_Driver2.18 u1_U_M_Driver3.17 u1_U_M_Driver3.18 u2.6 u4.6 u4.32 u4.39 u4.40 u5.7 u5.8 u5.11
copper on no net:
  other v2: 7815,1126.89 8185,1126.89 8560,1126.89 8930,1126.89 7736.26,1166.26 7893.74,1166.26 8106.26,1166.26 8263.74,1166.26 8481.26,1166.26 8638.74,1166.26 8851.26,1166.26 9008.74,1166.26 7696.89,1245 7933.11,1245 8066.89,1245 8303.11,1245 8441.89,1245 8678.11,1245 8811.89,1245 9048.11,1245 7736.26,1323.74 7893.74,1323.74 8106.26,1323.74 8263.74,1323.74 8481.26,1323.74 8638.74,1323.74 8851.26,1323.74 9008.74,1323.74 7815,1363.11 8185,1363.11 8560,1363.11 8930,1363.11